# Altium PCB PCB1.PcbDoc
Units mil, origin at the board's own origin, x right, y up, seen from the top; angles counter-clockwise.
Board outline 8750 x 3800 mil, 2 copper layers (Top Layer, Bottom Layer); 12 components, 31 nets, 108 pads, 0 vias.
Unrouted connection lines stored in the file: 26.
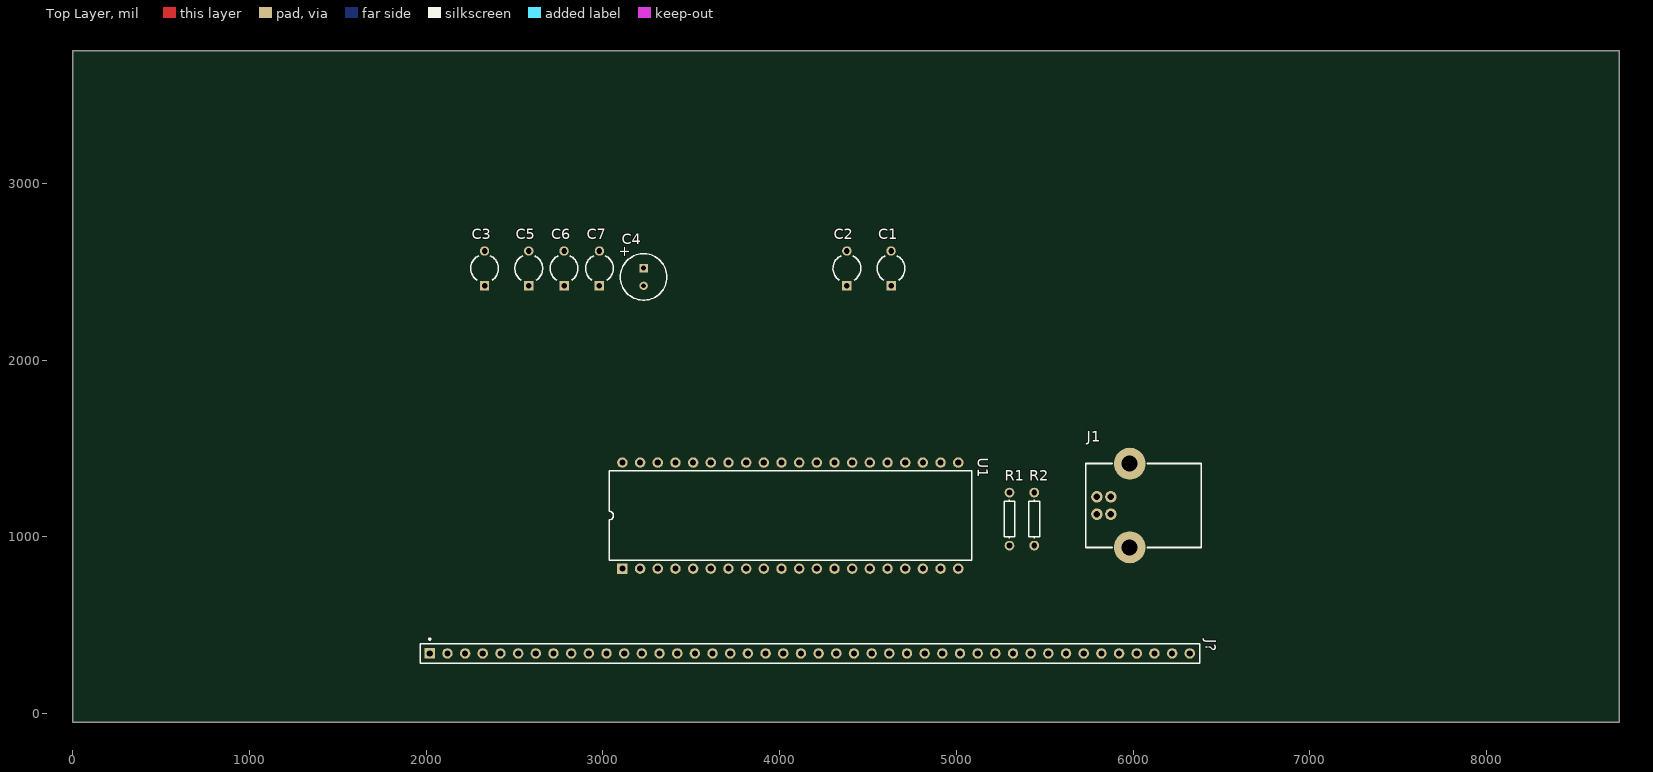
[diagram p0: Top Layer view]
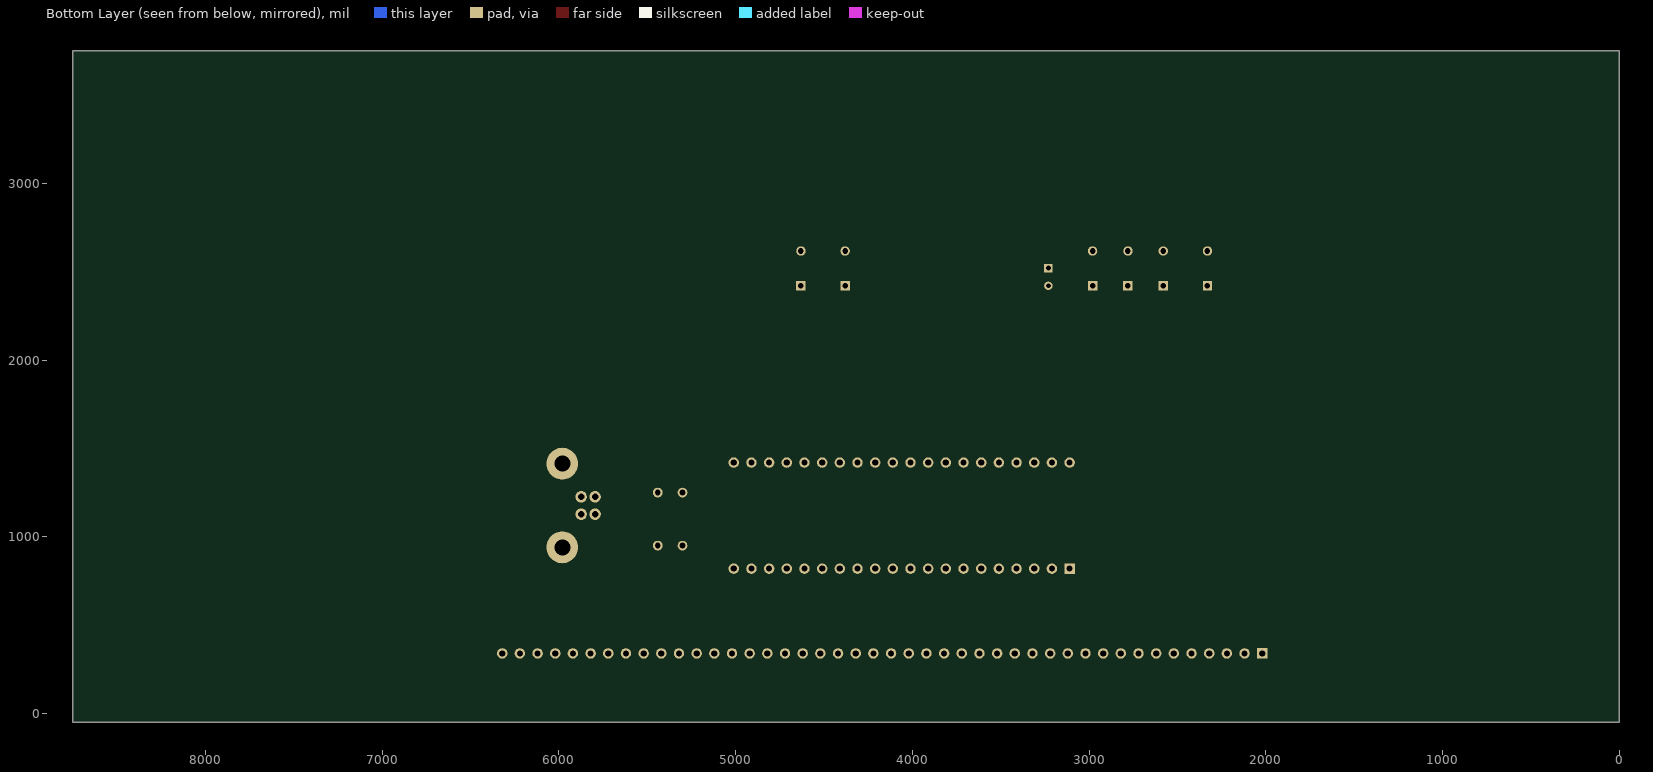
[diagram p1: Bottom Layer view, seen from below]

## Layer stack, top to bottom
Top Layer: signal copper 1.4
Dielectric: dielectric 12.6, FR-4, Dk 4.8
Bottom Layer: signal copper 1.4

## Board outline
0,-50 8750,-50 8750,3750 0,3750

## Design rules (kind name [scope] priority, off if disabled: settings)
Clearance [All] p1: gap=10
ComponentClearance [All] p1: gap=10 collisioncheckmode=0
HoleSize [All] p1: absolutevalues=TRUE maxlimit=200 minlimit=1 maxpercent=80.000 minpercent=20.000
PolygonConnect [All] p1: connectstyle=Relief reliefconductorwidth=10 reliefentries=4 polygonreliefangle="90 Angle"
RoomDefinition Sheet1 [InComponentClass('Sheet1')] p1: confinementstyle=ConfineIn formatcopy=TRUE outline 0,0 2000,0 2000,1000 0,1000
RoutingLayers [All] p1: top layer=Horizontal bottom layer=Vertical
RoutingVias [All] p1: holewidth=28 width=50 viastyle="Through Hole" minholewidth=28 minwidth=50 maxholewidth=28 maxwidth=50
SolderMaskExpansion [All] p1: expansion=4
TestPointUsage [All] p1: valid=0 allowmultiple=FALSE
Testpoint [All] p1: side=15 testpointundercomponent=TRUE minsize=40 maxsize=100 preferedsize=60 minholesize=0 maxholesize=40 preferedholesize=32 testpointgrid=1 style=1023 order=-539222988
Width [All] p1: maxlimit=10 minlimit=10 preferedwidth=10
15 further rules are at their usual default settings.

## Components (designator, comment, footprint, x,y, rotation, side; value= is the part's Value field where it differs from the comment)
C1 "Cap2" CAPR5-4X5 4630,2420 r90 top
C2 "Cap2" CAPR5-4X5 4380,2420 r90 top
C3 "" CAPR5-4X5 2330,2420 r90 top
C4 "10uF" CAP-EE-1 3230,2620 r90 top
C5 "" CAPR5-4X5 2580,2420 r90 top
C6 "" CAPR5-4X5 2780,2420 r90 top
C7 "" CAPR5-4X5 2980,2420 r90 top
J1 "USB" USB-TYPEB 5980,940 r90 top
J? "Edge Con 44" PIN44 2020,340 r0 top
R1 "Res1" AXIAL-0.3 5300,1100 r90 top
R2 "Res1" AXIAL-0.3 5440,1100 r90 top
U1 "PIC16C765" DIP-40 4060,1120 r0 top

## Footprints (in the part's own frame and the unit in brackets; to place one, negate y for a bottom-side part, rotate by r counter-clockwise, add the part's x,y. Pads: shape width x height; smd on the part's side, far side on the other; paste and mask are expansions set on the pad)
AXIAL-0.3 [mm]
  round 1.4 hole 0.85: 1(-3.81,0) 2(3.81,0)
  silkscreen extent -2.77,-0.76 2.77,0.76
CAP-EE-1 [mm]
  rect 1.2x1.2 hole 0.7: 1(-2.54,0)
  round 1.2 hole 0.7: 2(-5.08,0)
  silkscreen extent -7.15,-3.34 -0.47,3.34
CAPR5-4X5 [mm]
  rect 1.35x1.35 hole 0.8: 1(0,0)
  round 1.35 hole 0.8: 2(5,0)
  silkscreen extent 0.81,-2 4.32,2
DIP-40 [mm]
  rect 1.5x1.5 hole 0.9: 1(-24.13,-7.62)
  round 1.5 hole 0.9: 2(-21.59,-7.62) 3(-19.05,-7.62) 4(-16.51,-7.62) 5(-13.97,-7.62) 6(-11.43,-7.62) 7(-8.89,-7.62) 8(-6.35,-7.62) 9(-3.81,-7.62) 10(-1.27,-7.62) 11(1.27,-7.62) 12(3.81,-7.62) 13(6.35,-7.62) 14(8.89,-7.62) 15(11.43,-7.62) 16(13.97,-7.62) 17(16.51,-7.62) 18(19.05,-7.62) 19(21.59,-7.62) 20(24.13,-7.62) 21(24.13,7.62) 22(21.59,7.62) 23(19.05,7.62) 24(16.51,7.62) 25(13.97,7.62) 26(11.43,7.62) 27(8.89,7.62) 28(6.35,7.62) 29(3.81,7.62) 30(1.27,7.62) 31(-1.27,7.62) 32(-3.81,7.62) 33(-6.35,7.62) 34(-8.89,7.62) 35(-11.43,7.62) 36(-13.97,7.62) 37(-16.51,7.62) 38(-19.05,7.62) 39(-21.59,7.62) 40(-24.13,7.62)
  silkscreen extent -26.05,-6.45 26.05,6.45
PIN44 [mm]
  rect 1.5x1.5 hole 0.9: 1(0,0)
  round 1.5 hole 0.9: 2(2.54,0) 3(5.08,0) 4(7.62,0) 5(10.16,0) 6(12.7,0) 7(15.24,0) 8(17.78,0) 10(22.86,0) 11(25.4,0) 12(27.94,0) 13(30.48,0) 14(33.02,0) 15(35.56,0) 16(38.1,0) 17(40.64,0) 18(43.18,0) 19(45.72,0) 20(48.26,0) 21(50.8,0) 22(53.34,0) 23(55.88,0) 24(58.42,0) 25(60.96,0) 26(63.5,0) 27(66.04,0) 28(68.58,0) 29(71.12,0) 30(73.66,0) 31(76.2,0) 32(78.74,0) 33(81.28,0) 34(83.82,0) 35(86.36,0) 36(88.9,0) 37(91.44,0) 38(93.98,0) 39(96.52,0) 40(99.06,0) 41(101.6,0) 42(104.14,0) 43(106.68,0) 44(109.22,0)
  oval 1.51x1.5 hole 0.9: 9(20.32,0)
  silkscreen extent -1.4,-1.4 110.62,2.17
USB-TYPEB [mm]
  round 1.651 hole 0.92: 1(7.27,4.71) 2(4.77,4.71) 3(4.77,2.71) 4(7.27,2.71)
  round 4.572 hole 2.3: 5(0,0) 5(12.04,0)
  silkscreen extent 0,-10.3 12.04,6.3

## Part data
C1 C2: "Capacitor"
C3 C5 C6 C7: library part Cap2, "Capacitor"
C4: library part "Cap Pol1", "Polarized Capacitor (Radial)"
J1: library part "USB Type B", "Header, 4-Pin"
J?: "44-Pin Edge Connector"
R1 R2: "Resistor"
U1: "EPROM-Based 8-Bit CMOS Microcontroller with USB"

## Nets (pads, with @x,y where several pads share a name; then routed paths per layer and width w, separated by ;. In a path a pad name is that pad's centre, name@x,y a point inside that pad or via, vN(x,y) a via of type N, cw(c..) or ccw(c..) an arc to the next point about the centre after c; other vN are vias at no path point)
GND: C1.1 C2.1 C3.1 C4.2 C5.1 C6.1 C7.1 J1.4 J1.5 U1.12 U1.31
NetC1_2: C1.2 U1.13
NetC2_2: C2.2 U1.14
NetC3_2: C3.2 R1.1 U1.18
NetJ1_2: J1.2 R1.2 U1.23
NetJ1_3: J1.3 U1.24
NetR2_1: R2.1 U1.1
NetU1_2: 
NetU1_3: 
NetU1_4: 
NetU1_5: 
NetU1_6: 
NetU1_7: 
NetU1_8: 
NetU1_9: 
NetU1_10: 
NetU1_16: 
NetU1_17: 
NetU1_19: 
NetU1_20: 
NetU1_21: 
NetU1_22: 
NetU1_25: 
NetU1_26: 
NetU1_27: 
NetU1_28: 
NetU1_29: 
NetU1_30: 
NetU?_13: 
NetU?_14: 
VCC: C4.1 C5.2 C6.2 C7.2 J1.1 R2.2 U1.11 U1.32
pads on no net: J?.1 J?.2 J?.3 J?.4 J?.5 J?.6 J?.7 J?.8 J?.9 J?.10 J?.11 J?.12 J?.13 J?.14 J?.15 J?.16 J?.17 J?.18 J?.19 J?.20 J?.21 J?.22 J?.23 J?.24 J?.25 J?.26 J?.27 J?.28 J?.29 J?.30 J?.31 J?.32 J?.33 J?.34 J?.35 J?.36 J?.37 J?.38 J?.39 J?.40 J?.41 J?.42 J?.43 J?.44 U1.2 U1.3 U1.4 U1.5 U1.6 U1.7 U1.8 U1.9 U1.10 U1.15 U1.16 U1.17 U1.19 U1.20 U1.21 U1.22 U1.25 U1.26 U1.27 U1.28 U1.29 U1.30 U1.33 U1.34 U1.35 U1.36 U1.37 U1.38 U1.39 U1.40

## Text inside footprints (layer, text, board x,y; h text height)
C4: Top Overlay "+" at 3150,2580 h59.06 r90